# Altium PCB Adafruit Bluefruit LE SPI Friend.PcbDoc
Units mil, origin at the board's own origin, x right, y up, seen from the top; angles counter-clockwise.
Board outline 900 x 1000 mil, 2 copper layers (Top, Bottom); 29 components, 24 nets, 99 pads, 23 vias.
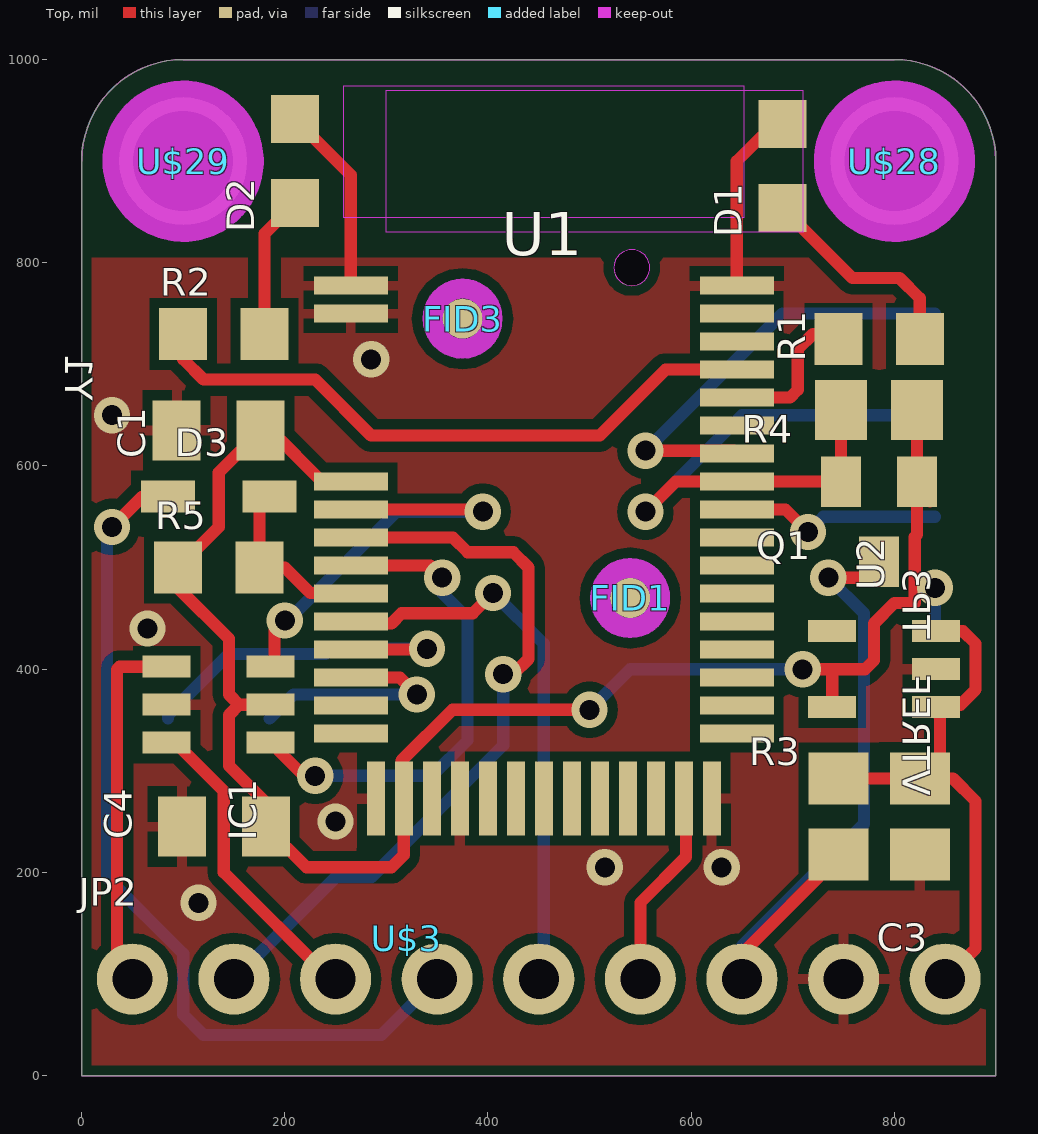
[diagram p0: Top view]
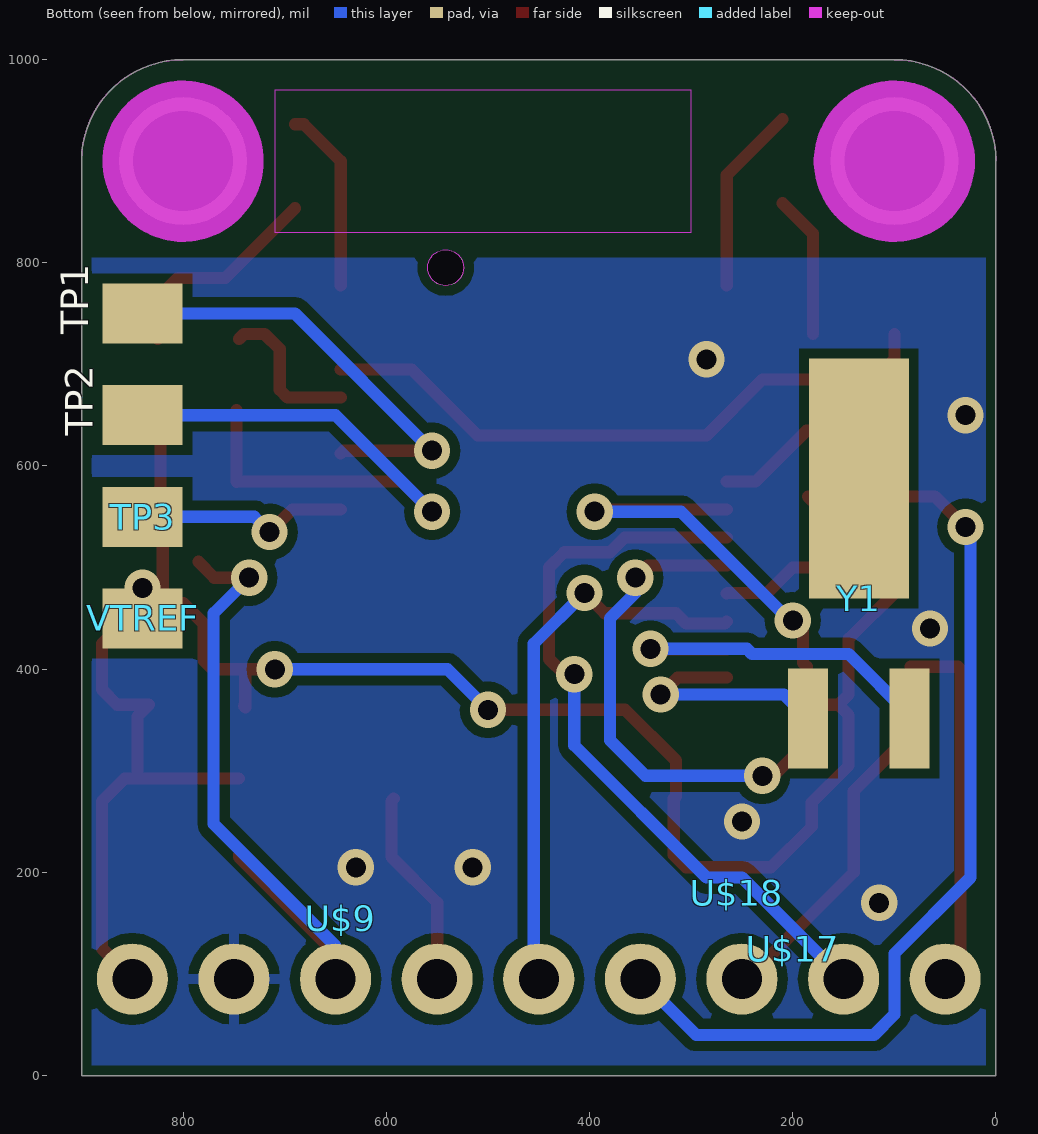
[diagram p1: Bottom view, seen from below]

## Layer stack, top to bottom
Top Solder: solder mask 0.4, Solder Resist, Dk 3.5
Top: signal copper 1.378
Dielectric 1: dielectric 12.6, FR-4, Dk 4.8
Bottom: signal copper 1.378
Bottom Solder: solder mask 0.4, Solder Resist, Dk 3.5

## Board outline
0,900 cw(c100,900) 100,1000 800,1000 cw(c800,900) 900,900 900,0 0,0
cut-out: 541.61,777.49 ccw(c541.61,795.2) 559.33,795.2 ccw(c541.61,795.2) 541.61,812.91 ccw(c541.61,795.2) 523.89,795.2 ccw(c541.61,795.2)

## Design rules (kind name [scope] priority, off if disabled: settings)
BoardOutlineClearance mdCopperDimension [All] p1: gap=10 ignorepadtopadclearanceinfootprint=FALSE except(0: Arc-SplitContinuation Track-SplitContinuation SMDPad-SplitContinuation THPad-SplitContinuation Via-SplitContinuation Fill-SplitContinuation Poly-SplitContinuation Region-SplitContinuation Text-SplitContinuation)
Clearance Clearance_for_PolygonClass_Isolate_10 [InPolygonClass('Isolate_10') vs IsArc Or IsTrack Or IsPad Or IsVia Or IsFill Or IsRegion Or IsText] p1: gap=10 ignorepadtopadclearanceinfootprint=FALSE
Clearance "Clearance (Same Net)" [All] p2: gap=8 ignorepadtopadclearanceinfootprint=FALSE
Clearance [All] p3: gap=8 ignorepadtopadclearanceinfootprint=FALSE
HoleSize [All] p1: absolutevalues=TRUE maxlimit=100000 minlimit=15.5 maxpercent=80.000 minpercent=20.000
HoleToHoleClearance mdDrill [All] p1: gap=8 allowstackedmicrovias=TRUE
MinimumSolderMaskSliver [All] p1 off: minsoldermaskwidth=10
PasteMaskExpansion Expansion_SMDPaste_OFF [InPadClass('SMDPaste_OFF')] p1: expansion=0
PasteMaskExpansion mlMinCreamFrame [All] p2: expansion=0
PolygonConnect PolygonConnect_For_PolygonThermal_ON_Width100000_Gap100000 [InPolygonClass('PolygonThermal_ON_Width100000_Gap100000') vs Not IsVia] p1: connectstyle=Relief reliefconductorwidth=10 reliefentries=4 polygonreliefangle="90 Angle" airgapwidth=10
PolygonConnect ThermalVias [IsVia] p2: connectstyle=Direct reliefconductorwidth=10 reliefentries=4 polygonreliefangle="90 Angle" airgapwidth=10
PolygonConnect [All] p3: connectstyle=Relief reliefconductorwidth=10 reliefentries=4 polygonreliefangle="90 Angle" airgapwidth=10
RoutingVias [All] p1: holewidth=15.5 width=31.5 viastyle="Through Hole" minholewidth=15.5 minwidth=31.5 maxholewidth=100 maxwidth=100
SolderMaskExpansion mlMinStopFrame [All] p1: expansion=2 istentingtop=FALSE
Width [All] p1: maxlimit=10000 minlimit=8 preferedwidth=8
26 further rules are at their usual default settings.

## Classes and differential pairs
polygon class PolygonThermal_ON_Width100000_Gap100000: Polygon_1_Net_GND Polygon_2_Net_GND
polygon class Isolate_10: Polygon_1_Net_GND Polygon_2_Net_GND
pad class SMDPaste_OFF: FID1-1 FID3-1 TP1-P$1 TP2-P$1 TP3-P$1 VTREF-P$1

## Components (designator, comment, footprint, x,y, rotation, side; value= is the part's Value field where it differs from the comment)
C1 "1uF" 0805_10MGAP 135,635 r180 top
C3 "10uF" 0805-NO 825,255 r270 top
C4 "10uF" 0805_10MGAP 140,245 r180 top
D1 "RED" CHIPLED_0805_NOOUTLINE 690,895 r0 top
D2 "BLUE" CHIPLED_0805_NOOUTLINE 210,900 r0 top
D3 "1N4148" SOD-323 135,570 r0 top
FID1 "" FIDUCIAL_1MM 540,470 r0 top
FID3 "" FIDUCIAL_1MM 375,745 r0 top
IC1 "74LVC2G34DBVR" SOT23-6 135,365 r270 top
JP2 "" 1X09_ROUND_70 450,95 r0 top
Q1 "BSS138" SOT23-WIDE@1 785,545 r180 top
R1 "2K" _0805MP 785,725 r0 top
R2 "2K" _0805MP 140,730 r0 top
R3 "100K" 0805-NO 745,255 r270 top
R4 "100K" 0805-NO 785,655 r180 top
R5 "100K" _0805MP 135,500 r0 top
TP1 "SWCLK" PAD-1.5X2.0 840,750 r90 bottom
TP2 "SWDIO" PAD-1.5X2.0 840,650 r90 bottom
TP3 "FCTRST" PAD-1.5X2.0 840,550 r270 bottom
U1 "32KB NRF51822" BLE_MODULE_RAYTAC_MDBT40 455,620 r0 top
U2 "MIC5225-3.3" SOT23-5 790,400 r90 top
U$3 "" ADAFRUIT_2.5MM 320,135 r0 top
U$9 "" BLUEFRUITLOGO_100MM 645,155 r180 bottom
U$17 "" ADAFRUIT_3.5MM 200,125 r180 bottom
U$18 "" PCBFEAT-REV-040 255,180 r180 bottom
U$28 "" MOUNTINGHOLE_2.5_PLATED 800,900 r0 top
U$29 "" MOUNTINGHOLE_2.5_PLATED 100,900 r0 top
VTREF "THREEV" PAD-1.5X2.0 840,450 r270 bottom
Y1 "32.768kHz (535-9166-2-ND)" CRYSTAL_CYL_2X6MM_SMT 135,435 r270 bottom

## Footprints (in the part's own frame and the unit in brackets; to place one, negate y for a bottom-side part, rotate by r counter-clockwise, add the part's x,y. Pads: shape width x height; smd on the part's side, far side on the other; paste and mask are expansions set on the pad)
1X09_ROUND_70 [mil] "1X09_ROUND_70"
  round 70 hole 39.37: 1(-400,0) 2(-300,0) 3(-200,0) 4(-100,0) 5(0,0) 6(100,0) 7(200,0) 8(300,0) 9(400,0)
0805-NO [mil] "0805-NO"
  rect 51.18x59.06 smd: 1(-37.4,0) 2(37.4,0)
0805_10MGAP [mil] "0805_10MGAP"
  rect 47.24x59.06 smd: 1(-41.34,0) 2(41.34,0)
_0805MP [mil] "_0805MP"
  rect 47.24x51.18 smd: 1(-40,0) 2(40,0)
ADAFRUIT_2.5MM [mil] "ADAFRUIT_2.5MM"
ADAFRUIT_3.5MM [mil] "ADAFRUIT_3.5MM"
BLE_MODULE_RAYTAC_MDBT40 [mm] "BLE_MODULE_RAYTAC_MDBT40"
  rect 1.85x0.45 smd: 1(-4.825,4) 2(-4.825,3.3) 3(-4.825,-0.9) 4(-4.825,-1.6) 5(-4.825,-2.3) 6(-4.825,-3) 7(-4.825,-3.7) 8(-4.825,-4.4) 9(-4.825,-5.1) 10(-4.825,-5.8) 11(-4.825,-6.5) 12(-4.825,-7.2) 26(4.825,-7.2) 27(4.825,-6.5) 28(4.825,-5.8) 29(4.825,-5.1) 30(4.825,-4.4) 31(4.825,-3.7) 32(4.825,-3) 33(4.825,-2.3) 34(4.825,-1.6) 35(4.825,-0.9) 36(4.825,-0.2) 37(4.825,0.5) 38(4.825,1.2) 39(4.825,1.9) 40(4.825,2.6) 41(4.825,3.3) 42(4.825,4)
  rect 0.45x1.85 smd: 13(-4.2,-8.825) 14(-3.5,-8.825) 15(-2.8,-8.825) 16(-2.1,-8.825) 17(-1.4,-8.825) 18(-0.7,-8.825) 19(0,-8.825) 20(0.7,-8.825) 21(1.4,-8.825) 22(2.1,-8.825) 23(2.8,-8.825) 24(3.5,-8.825) 25(4.2,-8.825)
  Top keep-out region: -5,5.7 -5,9 5,9 5,5.7
BLUEFRUITLOGO_100MM [mil] "BLUEFRUITLOGO_100MM"
CHIPLED_0805_NOOUTLINE [mil] "CHIPLED_0805_NOOUTLINE"
  rect 47.24x47.24 smd: A(0,-41.34) C(0,41.34)
CRYSTAL_CYL_2X6MM_SMT [mm] "CRYSTAL_CYL_2X6MM_SMT"
  rect 2.5x1 smd: 1(2.125,1.27) 2(2.125,-1.27)
  rect 6x2.5 smd: CYLINDER(-3.875,0)
FIDUCIAL_1MM [mm] "FIDUCIAL_1MM"
  rrect100% 1x1 smd paste+0: 1(0,0)
  Top keep-out lines w0.5: -0.75,0 ccw(c0,0) 0,-0.75 ; -0.75,0 cw(c0,0) 0,0.75 ; -0.75,0 ccw(c0,0) 0,-0.75 ; -0.75,0 cw(c0,0) 0,0.75 ; 0,-0.75 ccw(c0,0) 0.75,0 ; 0,-0.75 ccw(c0,0) 0.75,0 ; 0,0.75 cw(c0,0) 0.75,0 ; 0,0.75 cw(c0,0) 0.75,0
MOUNTINGHOLE_2.5_PLATED [mil] "MOUNTINGHOLE_2.5_PLATED"
  round 125.98 hole 98.43: P$1(0,0)
  Top keep-out circle w80: c0,0 r39.37
  Top keep-out circle w80: c0,0 r39.37
  Bottom keep-out circle w80: c0,0 r39.37
  Bottom keep-out circle w80: c0,0 r39.37
PAD-1.5X2.0 [mm] "PAD-1.5X2.0"
  rect 1.5x2 smd paste+0: P$1(0,0)
PCBFEAT-REV-040 [mil] "PCBFEAT-REV-040"
SOD-323 [mil] "SOD-323"
  rect 53.15x31.5 smd: A(50,0) C(-50,0)
SOT23-5 [mil] "SOT23-5"
  rect 21.65x47.24 smd: 1(-37.4,-51.19) 2(0,-51.19) 3(37.4,-51.19) 4(37.4,51.19) 5(-37.4,51.19)
SOT23-6 [mil] "SOT23-6"
  rect 21.65x47.24 smd: 1(-37.4,-51.18) 2(0,-51.18) 3(37.4,-51.18) 4(37.4,51.18) 5(0,51.18) 6(-37.4,51.18)
SOT23-WIDE@1 [mm] "SOT23-WIDE@1"
  rect 1x1.27 smd: 1(-0.95,-1) 2(0.95,-1) 3(0,1)

## Part data
C1 C4: library part 0805_10MGAP, PackageName=0805_10MGAP
C3 R3 R4: library part 0805-NO, PackageName=0805-NO
D1 D2: library part CHIPLED_0805_NOOUTLINE, PackageName=CHIPLED_0805_NOOUTLINE
D3: library part SOD-323, PackageName=SOD-323
FID1 FID3: library part FIDUCIAL_1MM, PackageName=FIDUCIAL_1MM
IC1: library part SOT23-6, PackageName=SOT23-6
JP2: library part 1X09_ROUND_70, PackageName=1X09_ROUND_70
Q1: library part SOT23-WIDE@1, PackageName=SOT23-WIDE@1
R1 R2 R5: library part _0805MP, PackageName=_0805MP
TP1 TP2 TP3 VTREF: library part PAD-1.5X2.0, PackageName=PAD-1.5X2.0
U1: library part BLE_MODULE_RAYTAC_MDBT40, PackageName=BLE_MODULE_RAYTAC_MDBT40
U2: library part SOT23-5, PackageName=SOT23-5
U$3: library part ADAFRUIT_2.5MM, PackageName=ADAFRUIT_2.5MM
U$9: library part BLUEFRUITLOGO_100MM, PackageName=BLUEFRUITLOGO_100MM
U$17: library part ADAFRUIT_3.5MM, PackageName=ADAFRUIT_3.5MM
U$18: library part PCBFEAT-REV-040, PackageName=PCBFEAT-REV-040
U$28 U$29: library part MOUNTINGHOLE_2.5_PLATED, PackageName=MOUNTINGHOLE_2.5_PLATED
Y1: library part CRYSTAL_CYL_2X6MM_SMT, PackageName=CRYSTAL_CYL_2X6MM_SMT

## Free pads (board coordinates)
  round 35.43 hole 35.43 unplated: MH1(541.61,795.2)

## Via types
v1: diameter 35.69/35.69 (per signal layer), hole 19.69, Top to Bottom, 23 vias

## Nets (pads, with @x,y where several pads share a name; then routed paths per layer and width w, separated by ;. In a path a pad name is that pad's centre, name@x,y a point inside that pad or via, vN(x,y) a via of type N, cw(c..) or ccw(c..) an arc to the next point about the centre after c; other vN are vias at no path point)
3.3V: C1.1 C4.1 IC1.5 Q1.1 R4.1 R5.1 U1.3 U1.14 U2.5 VTREF.P$1 | length 1758.4
  Top w12: IC1.5 155,365 ; U1.3 236.77,584.57 186.34,635 C1.1 135,593.66 135,540 R5.1 95,480 145,430 145,375 155,365 ; v1(500,360) 365,360 315,310 315,274.76 U1.14 317.2,217.2 305,205 221.34,205 C4.1 181.34,268.66 145,305 145,355 155,365 ; v1(709.73,399.87) 709.86,400 735,400 ; U2.5@740,363.78 U2.5 738.82,396.19 735,400 ; R4.1 Q1.1 ; Q1.1@835,565 822.4,577.6 Q1.1 ; v1(840,480) 825,480 820,475 ; 735,400 771.22,400 780,408.78 780,445 800,465 820,465 820,475 ; 820,475 820,530 822.4,532.4 Q1.1
  Bottom w12: v1(500,360) 539.87,399.87 v1(709.73,399.87) ; VTREF.P$1 v1(840,480)
CONNECTED: R2.1 U1.39 | length 627.9
  Top w12: R2.1 100,705 120,685 230,685 285,630 510,630 574.8,694.8 U1.39
CS_3V: D3.A R5.2 U1.7 | length 174.8
  Top w12: D3.A 175,560 R5.2 200,500 225,475 264.37,475 U1.7
CS_5V: D3.C JP2.4 | length 861.6
  Top w12: v1(30,540) 60,570 D3.C
  Bottom w12: v1(30,540) 25,535 25,195 100,120 100,60 120,40 295,40 JP2.4
DCC: U1.15
DEC2: U1.41
DFU_3V: JP2.6 U1.24 | length 197.1
  Top w12: JP2.6 550,170 595,215 595,270.35 U1.24
FACTORYRST: TP3.P$1 U1.34 | length 210.4
  Top w12: U1.34 692.99,557.01 v1(715,535)
  Bottom w12: v1(715,535) 730,550 TP3.P$1
GND: C1.2 C3.2 C4.2 D1.C D2.C IC1.2 JP2.8 U1.1 U1.2 U1.13 U1.16 U1.25 U1.42 U2.2 | length 369.2
  Top w12: D2.C 265.04,886.3 U1.1 ; U1.42 644.96,899.96 681.34,936.34 D1.C
  other v1: 115,170 515,205 630,205 250,250 65,440 30,650 285,705
IRQ_3V: JP2.5 U1.8 | length 568.8
  Top w12: U1.8 266.81,445 305,445 315,455 385,455 v1(405,475) v1@415,475
  Bottom w12: v1(405,475) 455,425 455,95 JP2.5
MISO_3V: JP2.2 U1.5 | length 738.6
  Top w12: U1.5 365.55,529.45 380,515 425,515 440,500 440,410 425,395 v1(415,395)
  Bottom w12: JP2.2 250,195 285,195 415,325 v1(415,395)
MODE: R1.1 U1.38 | length 151.5
  Top w12: U1.38 697.24,667.24 705,675 705,715 720,730 740,730 R1.1
MOSI_3V: IC1.4 U1.6 | length 487.1
  Top w12: IC1.4 218.78,295 v1(230,295) ; U1.6 343.11,501.89 v1(355,490)
  Bottom w12: v1(230,295) 345,295 380,330 380,450 355,475 v1(355,490)
MOSI_5V: IC1.3 JP2.3 | length 309.4
  Top w12: IC1.3 92.4,327.6 140,280 140,200 245,95 JP2.3
N$1: U1.9 Y1.1 | length 360.9
  Top w12: U1.9 335.79,419.21 336.57,420 v1(340,420)
  Bottom w12: Y1.1 85,355 145,415 240,415 245,420 v1(340,420)
N$2: U1.10 Y1.2 | length 226.7
  Top w12: U1.10 313.35,391.65 v1(330,375)
  Bottom w12: Y1.2 208.66,375 v1(330,375)
N$5: D1.A R1.2 | length 211.7
  Top w12: D1.A 758.66,785 805,785 825,765 R1.2
N$6: D2.A R2.2 | length 141.1
  Top w12: R2.2 180,828.66 D2.A
SCK_3V: IC1.6 U1.4 | length 421.4
  Top w12: IC1.6 190,406.22 190,438 v1(200,448) ; U1.4 387.99,557.01 390,555 v1(395,555)
  Bottom w12: v1(200,448) 203,448 310,555 v1(395,555)
SCK_5V: IC1.1 JP2.1 | length 361
  Top w12: JP2.1 35,110 35,400 37.4,402.4 IC1.1
SWCLK: TP1.P$1 U1.36 | length 432.1
  Top w12: v1(555,615) 642.09,615 U1.36
  Bottom w12: v1(555,615) 690,750 TP1.P$1
SWDIO/RST_3V: Q1.2 R4.2 TP2.P$1 U1.35 | length 599.9
  Top w12: v1(555,555) 584.57,584.57 U1.35 747.4,584.57 Q1.2 R4.2
  Bottom w12: v1(555,555) 650,650 TP2.P$1
SWDIO/RST_5V: JP2.7 Q1.3 R3.2 | length 677.6
  Top w12: JP2.7 650,117.6 650,120 745,215 R3.2 ; v1(735,490) 769.37,490 Q1.3
  Bottom w12: JP2.7 650,127.6 770,247.6 770,455 v1(735,490)
VIN: C3.1 JP2.9 R3.1 U2.1 U2.3 | length 556.7
  Top w12: R3.1 C3.1 C3.1@845,292.4 ; U2.1 841.79,361.99 U2.1@841.79,356.79 ; U2.3 867.6,437.4 880,425 880,380 865,365 833.59,365 U2.1@841.79,356.79 ; JP2.9 880,125 880,270 857.6,292.4 C3.1@845,292.4 ; U2.1@841.79,356.79 845,353.59 C3.1@845,292.4
pads on no net: FID1.1 FID3.1 U1.11 U1.12 U1.17 U1.18 U1.19 U1.20 U1.21 U1.22 U1.23 U1.26 U1.27 U1.28 U1.29 U1.30 U1.31 U1.32 U1.33 U1.37 U1.40 U2.4 U$28.P$1 U$29.P$1 Y1.CYLINDER

## Polygon pours and split planes (outlines as drawn)
GND on Top "Polygon_1_Net_GND" (solid, remove dead copper, pour order 1): 905,805 905,-5 -5,-5 -5,805
GND on Bottom "Polygon_2_Net_GND" (solid, remove dead copper, pour order 0): 905,805 905,-5 -5,-5 -5,805

## Keep-outs
Top:
  region: 300,830 300,970 710,970 710,830
Bottom:
  region: 710,970 710,830 300,830 300,970
Keep-Out Layer:
  the board outline again, w0

## Silkscreen, mask and mechanical layers (free items; w line width, h text height)
Dimension:
  the board outline again, w0
tPlace:
  text "Conn" at 76.77,772.09 h34
  text "Mode" at 708.61,763.93 h34
  text "Bluefruit LE SPI" at 42.91,264.83 h34 r90
  text "VIN" at 802.07,142.57 h34
  text "SCK" at 9.24,137.57 h34
  text "MOSI" at 187.91,137.57 h34
  text "IRQ" at 412.07,137.57 h34
  text "RST" at 599.24,137.57 h34
  text "GND" at 704.24,12.57 h34
  text "MISO" at 95.08,7.57 h34
  text "CS" at 316.24,7.57 h34
  text "DFU" at 499.24,7.57 h34
bPlace:
  text "Bluetooth LE" at 680,920 h42.5
  text "Bluefruit" at 680,845 h42.5
  text "Opt." at 186.08,797.91 h34
  text "SPI Friend" at 680,770 h42.5
  text "32KHz" at 214.41,737.91 h34
  text "SPI @ 500KHz" at 680,700 h34
  text "CLK" at 743.93,700 h34 r270
  text "Vin:3-5VDC" at 655,640 h34
  text "DIO" at 743.93,605 h34 r270
  text "Vlogic:3-5V" at 655,580 h34
  text "F.RST" at 780,518.93 h34
  text "3.3V" at 785,423.93 h34

## Text inside footprints (layer, text, board x,y; h text height)
D1: tDocu "C" at 686.06,942.24 h8.5; tDocu "A" at 686.06,839.88 h8.5
D2: tDocu "C" at 206.06,947.24 h8.5; tDocu "A" at 206.06,844.88 h8.5
U1: tDocu "(ANTENNA AREA)" at 455,896.8 h20.4; tDocu "KEEPOUT" at 455,932.8 h20.4
U$18: tPlace ">REV" at 269,160 h34